# Altium PCB and08479_Individual.PcbDoc
Units mil, origin at the board's own origin, x right, y up, seen from the top; angles counter-clockwise.
Board outline 3000 x 3000 mil, 2 copper layers (Top Layer, Bottom Layer); 22 components, 10 nets, 74 pads, 0 vias.
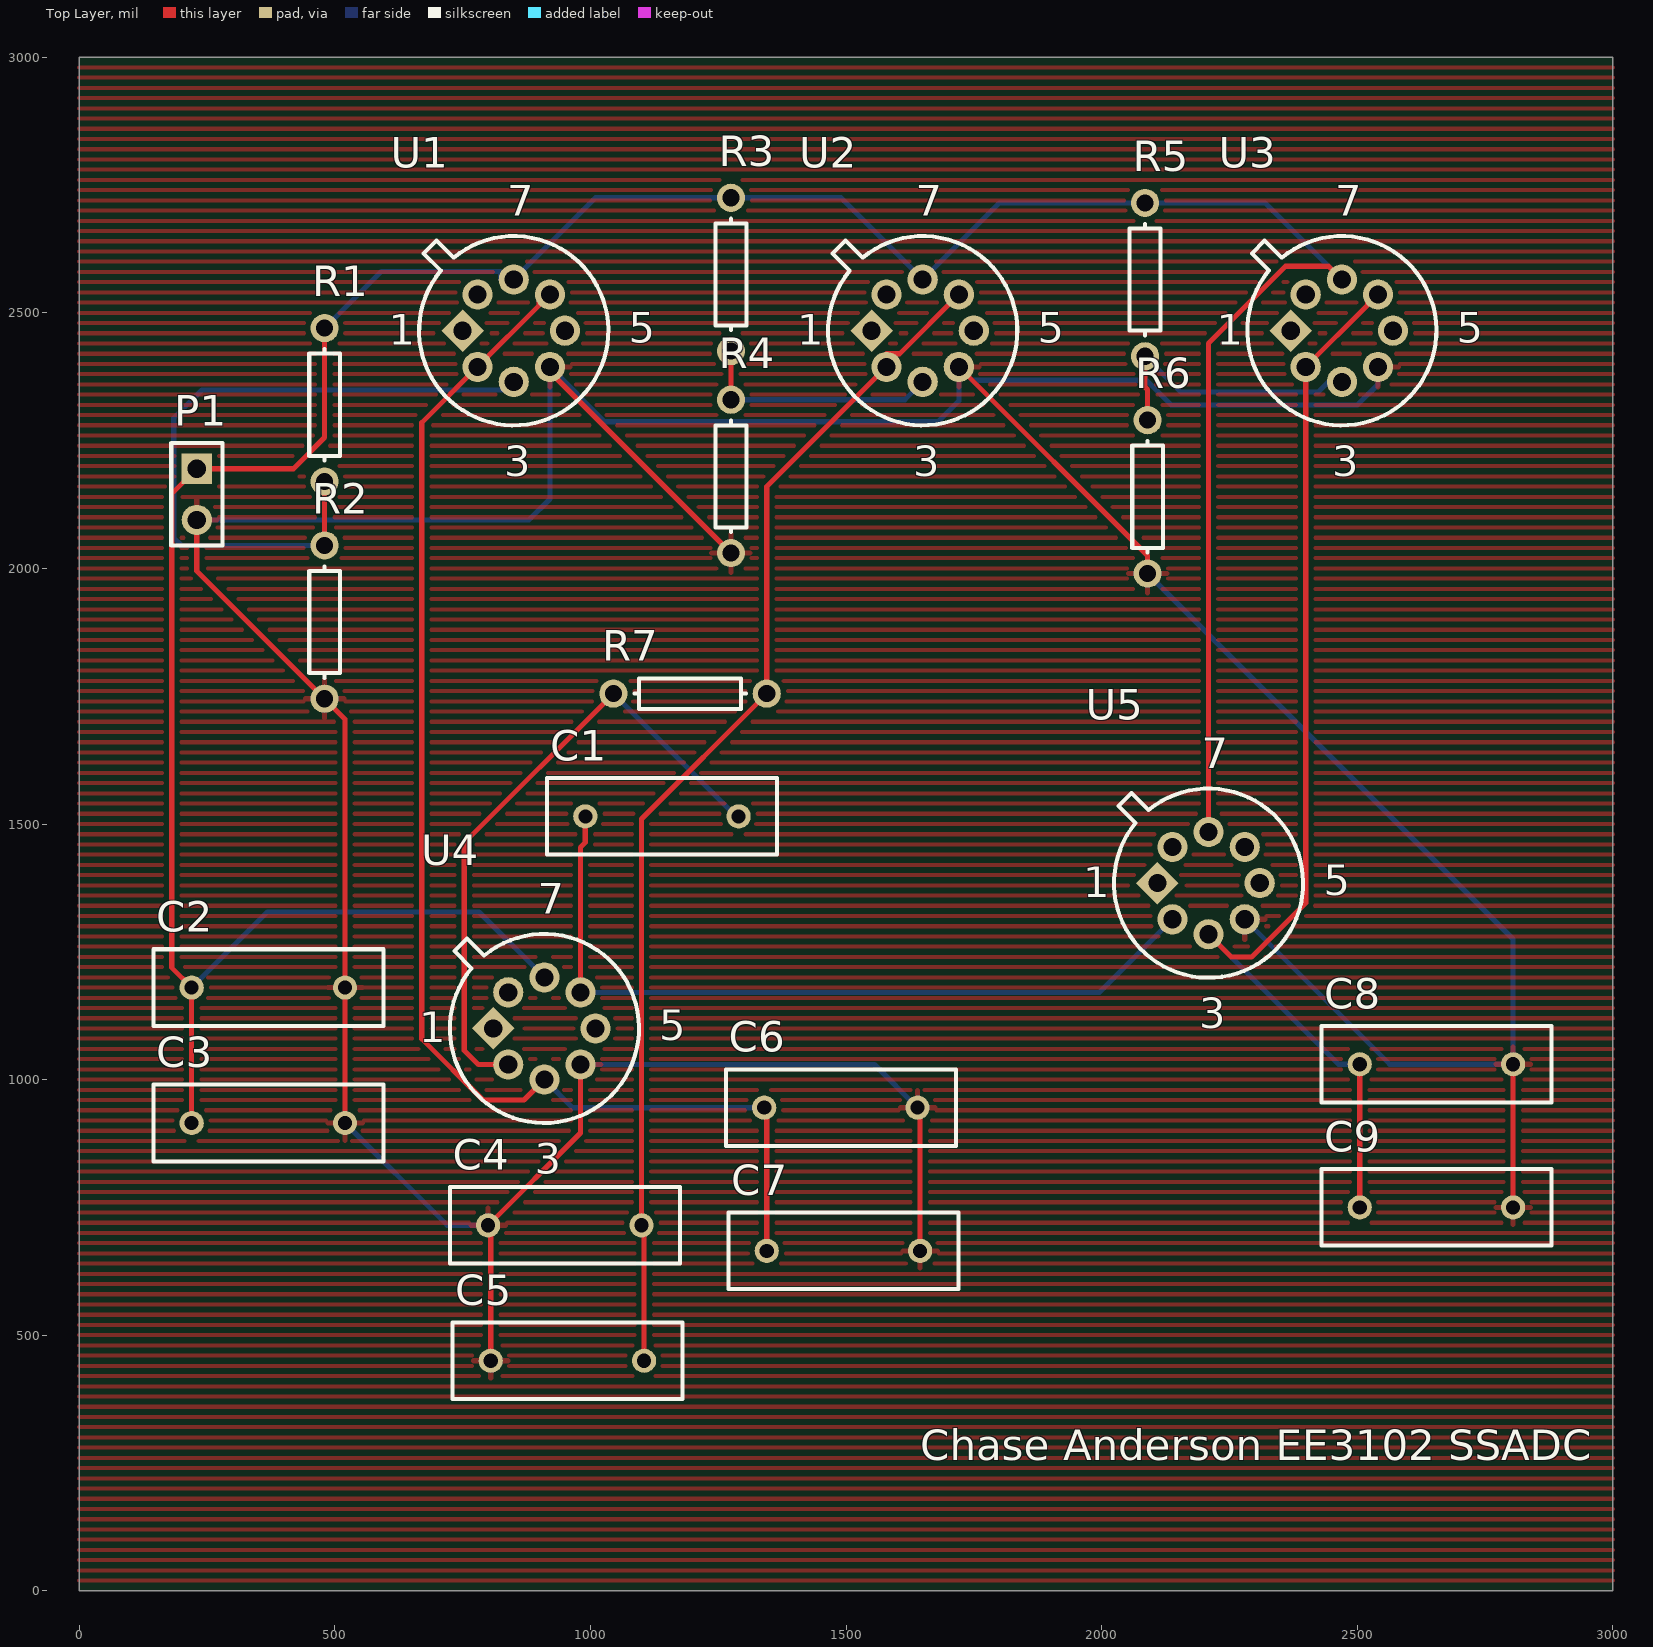
[diagram p0: Top Layer view]
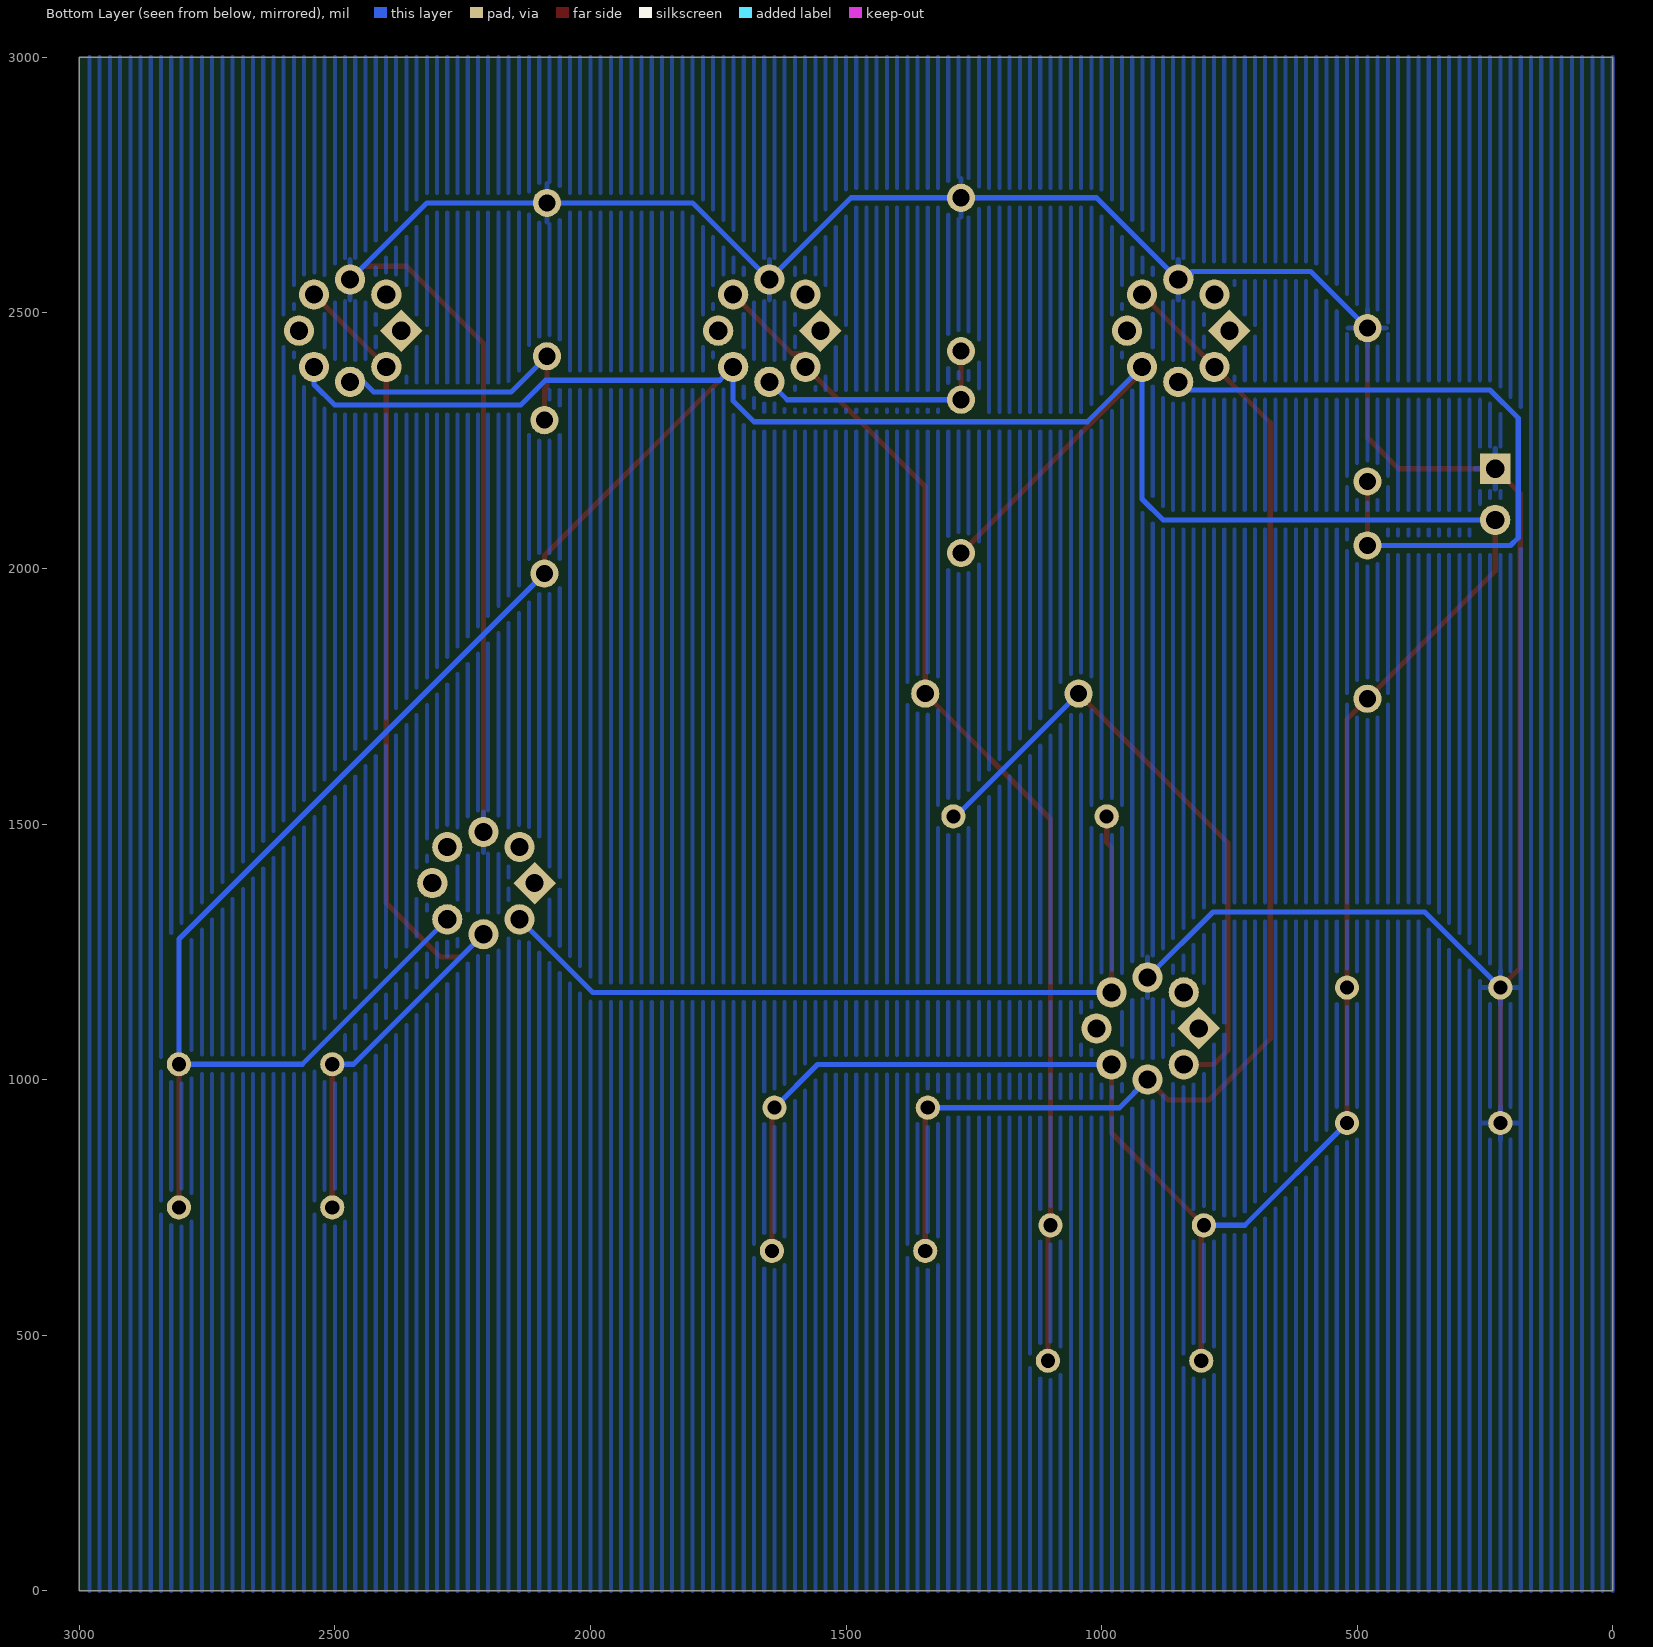
[diagram p1: Bottom Layer view, seen from below]

## Layer stack, top to bottom
Top Solder: solder mask 0.4, Solder Resist, Dk 3.5
Top Layer: signal copper 1.4
Dielectric 1: dielectric 12.6, FR-4, Dk 4.8
Bottom Layer: signal copper 1.4
Bottom Solder: solder mask 0.4, Solder Resist, Dk 3.5

## Board outline
0,0 0,3000 3000,3000 3000,0

## Design rules (kind name [scope] priority, off if disabled: settings)
Clearance [All] p1: gap=10 ignorepadtopadclearanceinfootprint=FALSE except(0: Arc-Hole Track-Hole SMDPad-Hole THPad-Hole Via-Hole Fill-Hole Poly-Hole Region-Hole Text-Hole)
PolygonConnect [All] p1: connectstyle=Relief reliefconductorwidth=10 reliefentries=4 polygonreliefangle="90 Angle" airgapwidth=10
RoutingVias [All] p1: holewidth=28 width=50 viastyle="Through Hole" minholewidth=28 minwidth=50 maxholewidth=28 maxwidth=50
SolderMaskExpansion [All] p1: expansion=4 istentingtop=FALSE
Width [All] p1: maxlimit=10 minlimit=10 preferedwidth=10
30 further rules are at their usual default settings.

## Components (designator, comment, footprint, x,y, rotation, side; value= is the part's Value field where it differs from the comment)
C1 "Cap" RAD-0.3 1140,1515 r180 top value=10u
C2 "Cap" RAD-0.3 370,1180 r0 top value=1u
C3 "Cap" RAD-0.3 370,915 r0 top value=1nf
C4 "Cap" RAD-0.3 950,715 r180 top value=1u
C5 "Cap" RAD-0.3 955,450 r180 top value=1nf
C6 "Cap" RAD-0.3 1490,945 r0 top value=1u
C7 "Cap" RAD-0.3 1495,665 r0 top value=1nf
C8 "Cap" RAD-0.3 2655,1030 r0 top value=1u
C9 "Cap" RAD-0.3 2655,750 r0 top value=1nf
P1 "Header 2" HDR1X2 230,2195 r270 top (schematic designator P?)
R1 "Res1" AXIAL-0.3 480,2320 r90 top value=6k
R2 "Res1" AXIAL-0.3 480,1895 r90 top value=2k
R3 "Res1" AXIAL-0.3 1275,2575 r90 top value=10k
R4 "Res1" AXIAL-0.3 1275,2180 r90 top value=2k
R5 "Res1" AXIAL-0.3 2085,2565 r90 top value=5k
R6 "Res1" AXIAL-0.3 2090,2140 r90 top value=5k
R7 "Res1" AXIAL-0.3 1195,1755 r180 top value=10k
U1 "Op Amp" H-08A 850,2465 r0 top
U2 "Op Amp" H-08A 1650,2465 r0 top
U3 "Op Amp" H-08A 2470,2465 r0 top
U4 "Op Amp" H-08A 910,1100 r0 top
U5 "Op Amp" H-08A 2209.29,1384.29 r0 top

## Footprints (in the part's own frame and the unit in brackets; to place one, negate y for a bottom-side part, rotate by r counter-clockwise, add the part's x,y. Pads: shape width x height; smd on the part's side, far side on the other; paste and mask are expansions set on the pad)
AXIAL-0.3 [mm] "Axial Device, Thru-Hole; 2 Leads; 0.3 in Pin Spacing"
  round 1.4 hole 0.85: 1(-3.81,0) 2(3.81,0)
  silkscreen extent -2.77,-0.76 2.77,0.76
H-08A [mm] "Can; 8 Leads; Pin Circle Dia. 5.08 mm; Lead Dia. 0.53 mm (max)"
  rect 1.5x1.5 hole 0.9 rot 45: 1(-2.54,0)
  round 1.5 hole 0.9: 2(-1.796,-1.796) 3(0,-2.54) 4(1.796,-1.796) 5(2.54,0) 6(1.796,1.796) 7(0,2.54) 8(-1.796,1.796)
  silkscreen extent -4.7,-4.7 4.7,4.7
HDR1X2 [mm] "Connector; Header; 2 Position"
  rect 1.5x1.5 hole 0.9: 1(0,0)
  round 1.5 hole 0.9: 2(2.54,0)
  silkscreen extent -1.27,-1.27 3.81,1.27
RAD-0.3 [mm] "Radial Cap, Thru-Hole; 2 Leads; 0.3 in Pin Spacing"
  round 1.2 hole 0.7: 1(-3.81,0) 2(3.81,0)
  silkscreen extent -5.71,-1.91 5.71,1.91

## Part data
C1 C2 C3 C4 C5 C6 C7 C8 C9: "Capacitor", LatestRevisionDate=17-Jul-2002, LatestRevisionNote="Re-released for DXP Platform.", PackageDescription="Radial Cap, Thru-Hole; 2 Leads; 0.3 in Pin Spacing", PackageReference=RAD-0.3, Published=8-Jun-2000, Publisher="Altium Limited"
P1: "Header, 2-Pin", LatestRevisionDate=17-Jul-2002, LatestRevisionNote="Re-released for DXP Platform.", Publisher="Altium Limited"
R1 R2 R3 R4 R5 R6 R7: "Resistor", LatestRevisionDate=17-Jul-2002, LatestRevisionNote="Re-released for DXP Platform.", PackageDescription="Axial Device, Thru-Hole; 2 Leads; 0.3 in Pin Spacing", PackageReference=AXIAL-0.3, Published=8-Jun-2000, Publisher="Altium Limited"
U1 U2 U3 U4 U5: "FET Operational Amplifier", ComponentLink1Description="Manufacturer Link", ComponentLink1URL=http://www.analog.com/, DatasheetVersion="REV. B", LatestRevisionDate=17-Jul-2002, LatestRevisionNote="Re-released for DXP Platform.", PackageDescription="Can; 8 Leads; Pin Circle Dia. 5.08 mm; Lead Dia. 0.53 mm (max)", PackageReference=H-08A, PackageVersion=1990, Published=8-Jun-2000, Publisher="Altium Limited"

## Nets (pads, with @x,y where several pads share a name; then routed paths per layer and width w, separated by ;. In a path a pad name is that pad's centre, name@x,y a point inside that pad or via, vN(x,y) a via of type N, cw(c..) or ccw(c..) an arc to the next point about the centre after c; other vN are vias at no path point)
GND: C2.2 C3.2 C4.2 C5.2 C6.2 C7.2 C8.2 C9.2 P1.2 R2.1 R4.1 R6.1 U1.4 U2.4 U3.4 U4.4 U5.4 | length 9338
  Top Layer w10: P1.2 230,1995 R2.1 520,1705 C2.2 C3.2 ; C5.2 805,710 C4.2 980.71,895.71 U4.4 ; U1.4 920.71,2384.29 R4.1 ; C6.2 1645,940 C7.2 ; U2.4 2090,2025 R6.1 ; C9.2 C8.2
  Bottom Layer w10: P1.2 880,2095 920.71,2135.71 U1.4 1028,2287 1680,2287 1720.71,2327.71 U2.4 1747,2368 2088,2368 2136,2320 2500.71,2320 2540.71,2360 U3.4 ; C3.2 720,715 C4.2 ; U4.4 1555.71,1029.29 C6.2 ; R6.1 2805,1275 C8.2 2563.58,1030 U5.4
NetC1_1: C1.1 R7.2 U4.2 | length 1260.9
  Top Layer w10: U4.2 780.71,1029.29 753.24,1056.76 753.24,1463.24 R7.2
  Bottom Layer w10: R7.2 1285,1515 C1.1
NetC1_2: C1.2 U4.6 U5.2 | length 1565.2
  Top Layer w10: U4.6 980.71,1454.37 990,1463.65 C1.2
  Bottom Layer w10: U4.6 1995.71,1170.71 U5.2
NetR1_1: R1.1 R2.2 U1.3 | length 1364
  Top Layer w10: R2.2 R1.1
  Bottom Layer w10: R2.2 200,2045 185,2060 185,2294 240,2349 850,2349 U1.3
NetR3_1: R3.1 R4.2 U2.3 | length 484.5
  Top Layer w10: R4.2 R3.1
  Bottom Layer w10: R4.2 1615,2330 U2.3
NetR5_1: R5.1 R6.2 U3.3 | length 549.4
  Top Layer w10: R5.1 2085,2355 2090,2350 R6.2
  Bottom Layer w10: R5.1 2155,2345 2424,2345 2444,2365 U3.3
Vdd: C2.1 C3.1 P1.1 R1.2 R3.2 R5.2 U1.7 U2.7 U3.7 U4.7 U5.7 | length 6208.7
  Top Layer w10: C3.1 C2.1 181,1219 181,2146 P1.1 419,2195 480,2256 R1.2 ; U5.7 2209.29,2440.29 2360,2591 2444,2591 U3.7
  Bottom Layer w10: C2.1 368,1328 782,1328 U4.7 ; R1.2 591,2581 824,2581 824,2565 U1.7 1010,2725 R3.2 1490,2725 U2.7 1800,2715 R5.2 2320,2715 U3.7
Vin: C8.1 C9.1 U3.2 U3.6 U5.3 | length 2193.9
  Top Layer w10: U5.3 2253.58,1240 2293.58,1240 2399.29,1345.71 U3.2 2520,2515 2520,2535.71 U3.6 ; C9.1 C8.1
  Bottom Layer w10: U5.3 2463.58,1030 C8.1
Vref: C4.1 C5.1 R7.1 U2.2 U2.6 | length 2360
  Top Layer w10: C5.1 1105,710 C4.1 1100,1510 R7.1 1345,2160 U2.2 1579.29,2420 1605,2420 U2.6
Vset: C6.1 C7.1 U1.2 U1.6 U4.3 | length 2612.8
  Top Layer w10: U4.3 870,960 790,960 670,1080 670,2285 U1.2 900,2515 900,2535.71 U1.6 ; C6.1 1345,940 C7.1
  Bottom Layer w10: U4.3 965,945 C6.1
pads on no net: U1.1 U1.5 U1.8 U2.1 U2.5 U2.8 U3.1 U3.5 U3.8 U4.1 U4.5 U4.8 U5.1 U5.5 U5.6 U5.8

## Polygon pours and split planes (outlines as drawn)
GND on Top Layer "GND_L01_P000" (hatched Horizontal grid 20 track 8, pour order 0): 0,3000 3000,3000 3000,0 0,0
Vdd on Bottom Layer "VDD_L02_P002" (hatched Vertical grid 20 track 8, pour order 2): 0,3000 0,266.67 0,0 3000,0 3000,3000

## Silkscreen, mask and mechanical layers (free items; w line width, h text height)
Top Overlay:
  text "Chase Anderson EE3102 SSADC" at 1645,255 h60

## Text inside footprints (layer, text, board x,y; h text height)
U1: Top Overlay "1" at 605.12,2437.6 h59.05; Top Overlay "3" at 831.54,2180.75 h59.05; Top Overlay "5" at 1074.88,2441.81 h59.05; Top Overlay "7" at 836.93,2689.41 h59.05
U2: Top Overlay "1" at 1405.12,2437.6 h59.05; Top Overlay "3" at 1631.53,2180.75 h59.05; Top Overlay "5" at 1874.88,2441.81 h59.05; Top Overlay "7" at 1636.93,2689.41 h59.05
U3: Top Overlay "1" at 2225.12,2437.6 h59.05; Top Overlay "3" at 2451.53,2180.75 h59.05; Top Overlay "5" at 2694.88,2441.81 h59.05; Top Overlay "7" at 2456.93,2689.41 h59.05
U4: Top Overlay "1" at 665.12,1072.6 h59.05; Top Overlay "3" at 891.54,815.75 h59.05; Top Overlay "5" at 1134.88,1076.81 h59.05; Top Overlay "7" at 896.93,1324.41 h59.05
U5: Top Overlay "1" at 1964.41,1356.89 h59.05; Top Overlay "3" at 2190.82,1100.04 h59.05; Top Overlay "5" at 2434.17,1361.1 h59.05; Top Overlay "7" at 2196.22,1608.7 h59.05